# EAGLE board Qwiic_Power_Meter-ACS37800-Panel (EAGLE 9.6.2), part 1 of 2
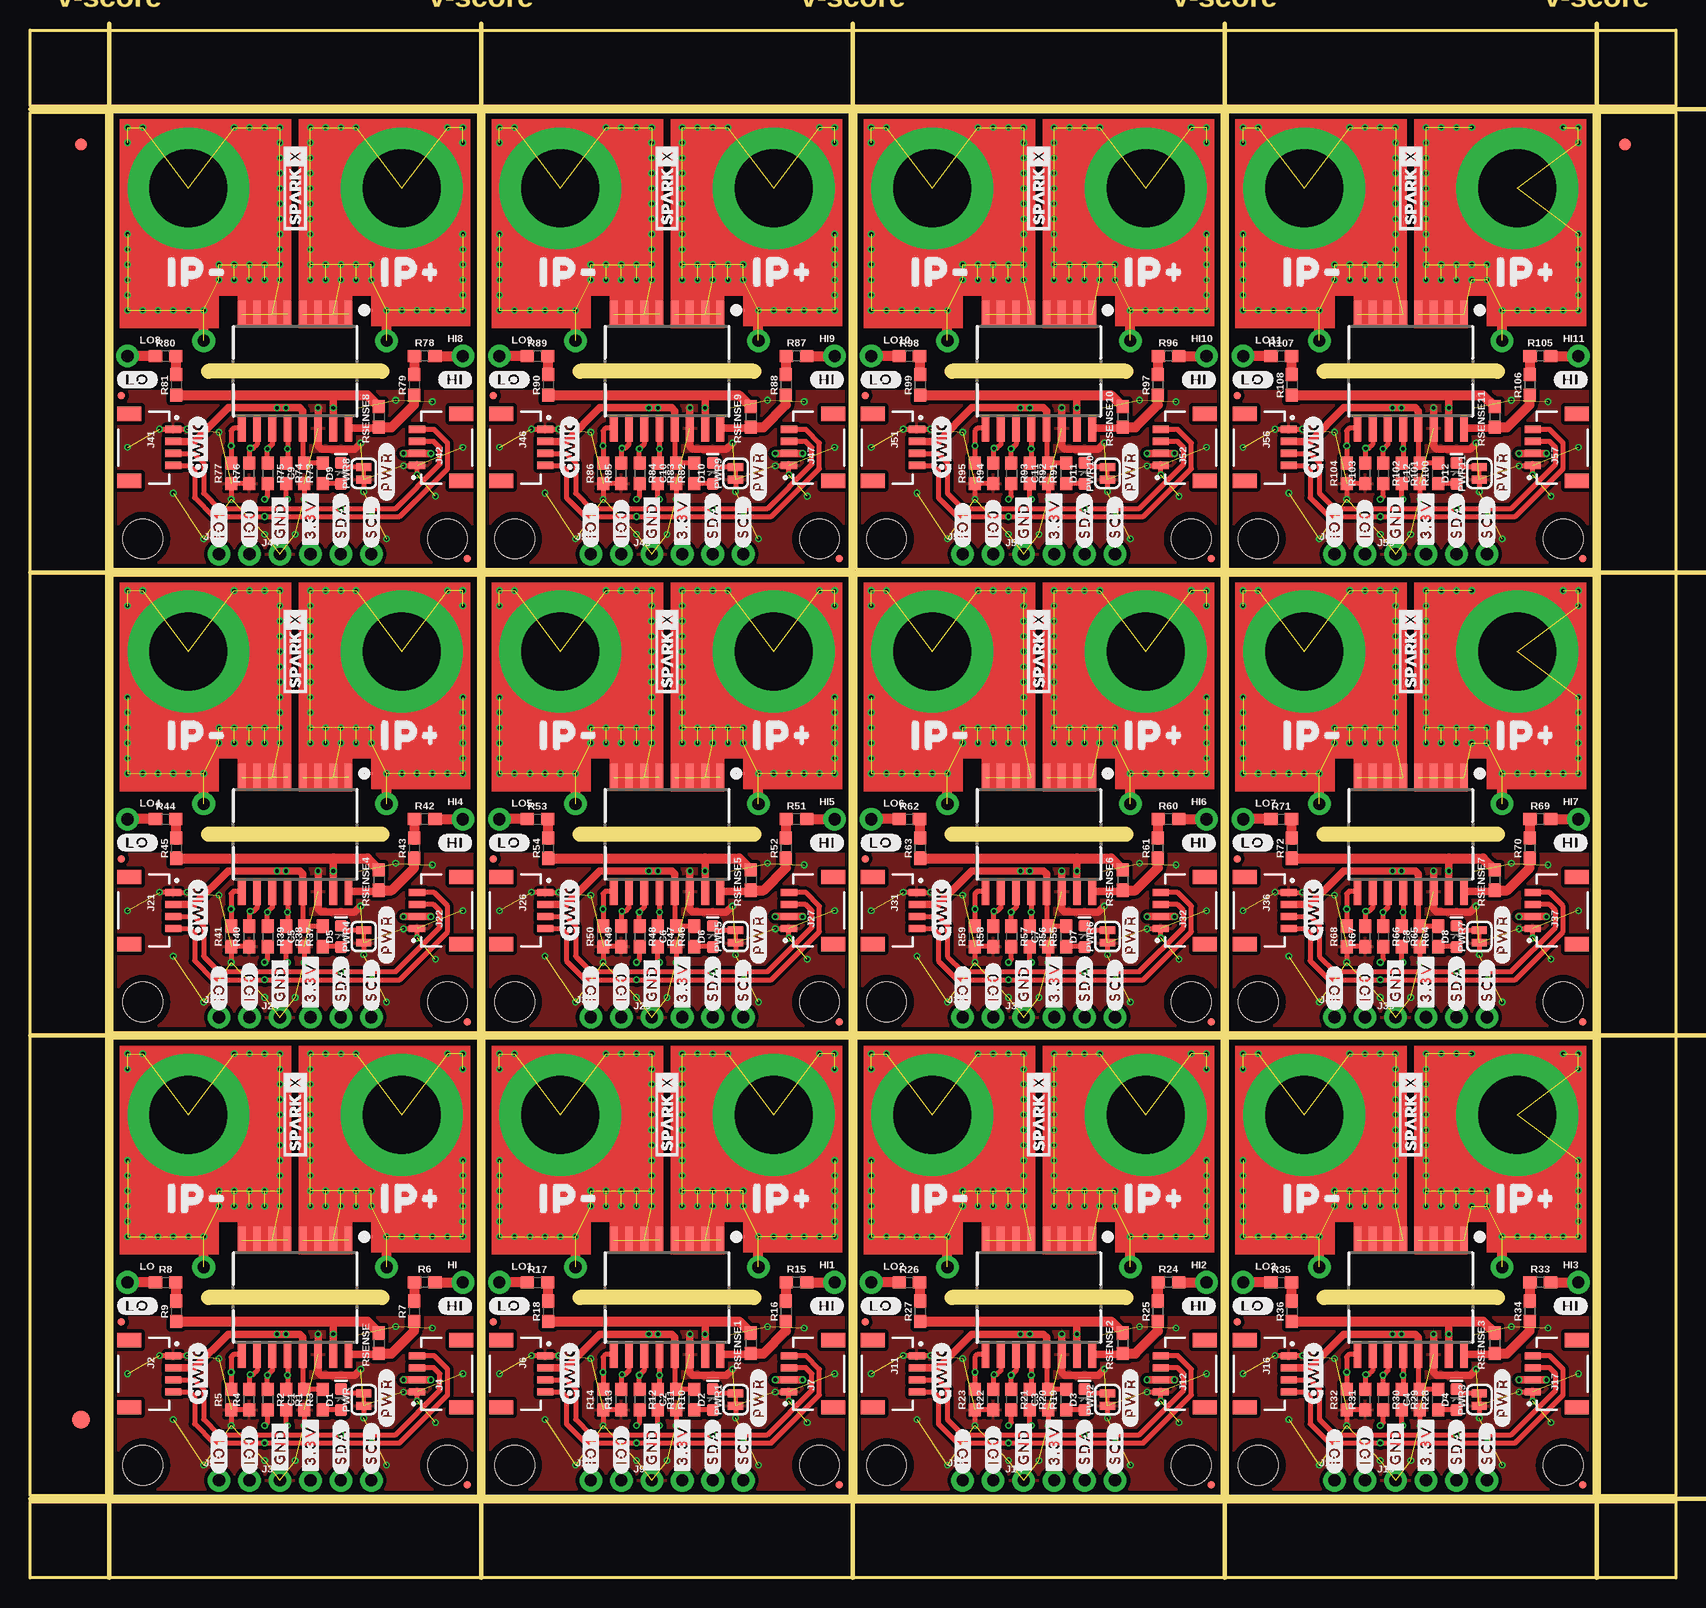
[diagram p0: board, top side]
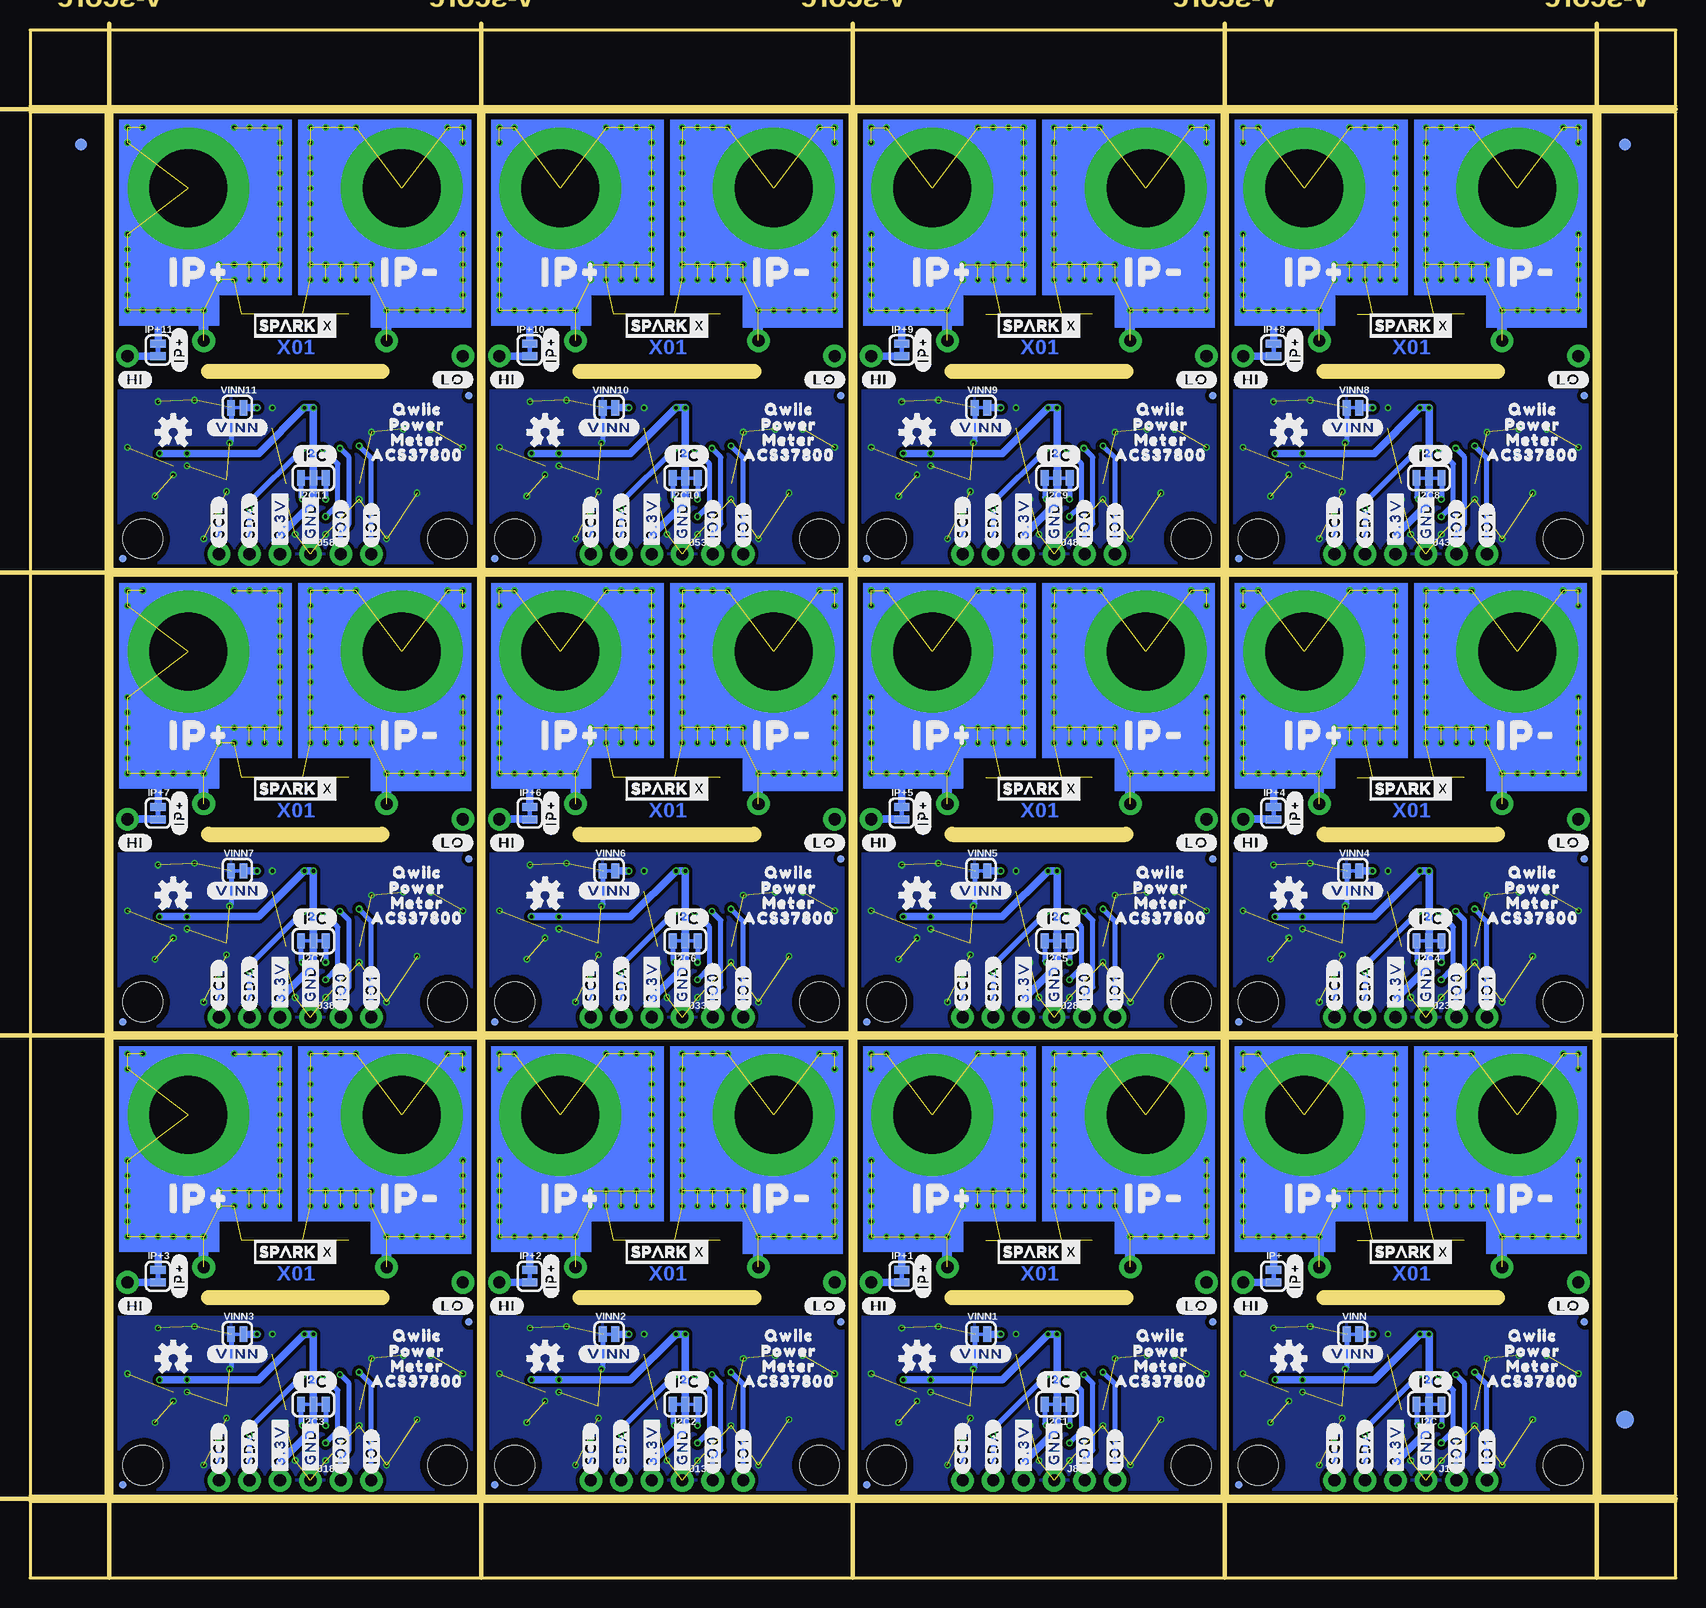
[diagram p1: board, bottom side, seen from below]

Size 137.16 x 129.03 mm. Coordinates in mm from the lower left corner, seen from the top.
Outline: 6.86,6.86 6.86,44.96 37.34,44.96 37.34,6.86 6.86,6.86
Outline: 37.85,6.86 37.85,44.96 68.33,44.96 68.33,6.86 37.85,6.86
Outline: 68.83,6.86 68.83,44.96 99.31,44.96 99.31,6.86 68.83,6.86
Outline: 99.82,6.86 99.82,44.96 130.3,44.96 130.3,6.86 99.82,6.86
Outline: 6.86,45.47 6.86,83.57 37.34,83.57 37.34,45.47 6.86,45.47
Outline: 37.85,45.47 37.85,83.57 68.33,83.57 68.33,45.47 37.85,45.47
Outline: 68.83,45.47 68.83,83.57 99.31,83.57 99.31,45.47 68.83,45.47
Outline: 99.82,45.47 99.82,83.57 130.3,83.57 130.3,45.47 99.82,45.47
Outline: 6.86,84.07 6.86,122.17 37.34,122.17 37.34,84.07 6.86,84.07
Outline: 37.85,84.07 37.85,122.17 68.33,122.17 68.33,84.07 37.85,84.07
Outline: 68.83,84.07 68.83,122.17 99.31,122.17 99.31,84.07 68.83,84.07
Outline: 99.82,84.07 99.82,122.17 130.3,122.17 130.3,84.07 99.82,84.07
Outline: 0,6.35 137.16,6.35 137.16,0 0,0 0,6.35
Outline: 130.81,122.17 137.16,122.17 137.16,6.86 130.81,6.86 130.81,122.17
Outline: 0,129.03 137.16,129.03 137.16,122.68 0,122.68 0,129.03
Outline: 0,122.17 6.35,122.17 6.35,6.86 0,6.86 0,122.17
Copper layers (1+2*15+16): Top 0.035mm / dielectric 0.2mm / Route2 0.0175mm / dielectric 1.065mm / Route15 0.0175mm / dielectric 0.2mm / Bottom 0.035mm
Design rules "Qwiic_Power_Meter-ACS37800": minimum track width 5mil, minimum drill 0.2mm, track to track 5mil, track to pad 0.2mm, pad to pad 5mil, via to via 0.2mm, smd to smd 0mil, copper to edge 0.2mm, drill to drill 10mil, minimum pad ring 0.13mm, minimum via ring 0.13mm, stop-mask expansion 0.05mm, vias tented up to drill 25mil, thermal gap 10mil
Milling: 9 lines

## Footprints (pad centres in the part's own frame; a part is rotated, then mirrored left to right if it is on the bottom)
0603 = smd 1.1 x 1: 1 -0.85,0; 2 0.85,0
LED-0603 = smd 1 x 1: A -0.877,0; C 0.877,0
FIDUCIAL-1X2 = smd 1 x 1: 1 0,0
FIDUCIAL-1.5X3 = smd 1.5 x 1.5: 1 0,0
1X01_NO_SILK = drill 1.016 pad 1.88: 1 0,0
SMT-JUMPER_3_2-NC_TRACE_SILK = smd 0.66 x 1.27: 1 -1.041,0; 2 0,0; 3 1.041,0
SMT-JUMPER_2_NC_TRACE_SILK = smd 0.66 x 1.27: 1 -0.521,0; 2 0.521,0
1X04_NO_SILK = drill 1.016 pad 1.88: 1 0,0; 2 2.54,0; 3 5.08,0; 4 7.62,0
JST04_1MM_RA = smd 0.6 x 1.35: 1 -1.5,0; 2 -0.5,0; 3 0.5,0; 4 1.5,0 | smd 1.2 x 2: NC1 2.8,-3.675; NC2 -2.8,-3.675
MICRO-FIDUCIAL = smd 0.635 x 0.635: 1 0,0
STAND-OFF = hole 3.302: 0,0
ACS37800_THROUGH_HOLE = smd 2.25 x 0.65: 1 -4.75,4.445; 2 -4.75,3.175; 3 -4.75,1.905; 4 -4.75,0.635; 5 -4.75,-0.635; 6 -4.75,-1.905; 7 -4.75,-3.175; 8 -4.75,-4.445; 9 4.75,-4.445; 10 4.75,-3.175; 11 4.75,-1.905; 12 4.75,-0.635; 13 4.75,0.635; 14 4.75,1.905; 15 4.75,3.175; 16 4.75,4.445 | drill 6.5 pad 10.16: C_IN -15.24,8.89; C_OUT -15.24,-8.89 | drill 1.016 pad 1.88: C_IN_BREAKOUT -2.54,7.62; C_OUT_BREAKOUT -2.54,-7.62 | drill 0.3: CIN1 -20.32,13.97; CIN2 -20.32,12.7; CIN3 -20.32,5.08; CIN4 -20.32,3.81; CIN5 -20.32,2.54; CIN6 -20.32,1.27; CIN7 -19.05,1.27; CIN8 -17.78,1.27; CIN9 -16.51,1.27; CIN10 -15.24,1.27; CIN11 -13.97,1.27; CIN12 -12.7,1.27; CIN13 -11.43,1.27; CIN14 -10.16,1.27; CIN15 -8.89,1.27; CIN16 -7.62,1.27; CIN17 -8.89,2.54; CIN18 -7.62,2.54; CIN19 -8.89,3.81; CIN20 -7.62,3.81; CIN21 -8.89,5.08; CIN22 -7.62,5.08; CIN23 -8.89,6.35; CIN24 -7.62,6.35; CIN25 -5.08,7.62; CIN26 -5.08,8.89; CIN27 -5.08,10.16; CIN28 -5.08,11.43; CIN29 -5.08,12.7; CIN30 -5.08,13.97; CIN31 -6.35,13.97; CIN32 -7.62,13.97; CIN33 -8.89,13.97; CIN34 -10.16,13.97; CIN35 -11.43,13.97; CIN36 -19.05,13.97; COUT1 -20.32,-13.97; COUT2 -19.05,-13.97; COUT3 -11.43,-13.97; COUT4 -10.16,-13.97; COUT5 -8.89,-13.97; COUT6 -7.62,-13.97; COUT7 -6.35,-13.97; COUT8 -5.08,-13.97; COUT9 -5.08,-12.7; COUT10 -5.08,-11.43; COUT11 -5.08,-10.16; COUT12 -5.08,-8.89; COUT13 -5.08,-7.62; COUT14 -7.62,-6.35; COUT15 -8.89,-6.35; COUT16 -7.62,-5.08; COUT17 -8.89,-5.08; COUT18 -7.62,-3.81; COUT19 -8.89,-3.81; COUT20 -7.62,-2.54; COUT21 -8.89,-2.54; COUT22 -7.62,-1.27; COUT23 -8.89,-1.27; COUT24 -10.16,-1.27; COUT25 -11.43,-1.27; COUT26 -12.7,-1.27; COUT27 -13.97,-1.27; COUT28 -15.24,-1.27; COUT29 -16.51,-1.27; COUT30 -17.78,-1.27; COUT31 -19.05,-1.27; COUT32 -20.32,-1.27; COUT33 -20.32,-2.54; COUT34 -20.32,-3.81; COUT35 -20.32,-5.08; COUT36 -20.32,-12.7

## Placement (x,y rotation side)
C1  0.1uF  [0603]  22.86,14.86 270 top
C2  0.1uF  [0603]  53.85,14.86 270 top
C3  0.1uF  [0603]  84.84,14.86 270 top
C4  0.1uF  [0603]  115.82,14.86 270 top
C5  0.1uF  [0603]  22.86,53.47 270 top
C6  0.1uF  [0603]  53.85,53.47 270 top
C7  0.1uF  [0603]  84.84,53.47 270 top
C8  0.1uF  [0603]  115.82,53.47 270 top
C9  0.1uF  [0603]  22.86,92.08 270 top
C10  0.1uF  [0603]  53.85,92.08 270 top
C11  0.1uF  [0603]  84.84,92.08 270 top
C12  0.1uF  [0603]  115.82,92.08 270 top
D1  RED  [LED-0603]  25.91,14.86 90 top
D2  RED  [LED-0603]  56.9,14.86 90 top
D3  RED  [LED-0603]  87.88,14.86 90 top
D4  RED  [LED-0603]  118.87,14.86 90 top
D5  RED  [LED-0603]  25.91,53.47 90 top
D6  RED  [LED-0603]  56.9,53.47 90 top
D7  RED  [LED-0603]  87.88,53.47 90 top
D8  RED  [LED-0603]  118.87,53.47 90 top
D9  RED  [LED-0603]  25.91,92.08 90 top
D10  RED  [LED-0603]  56.9,92.08 90 top
D11  RED  [LED-0603]  87.88,92.08 90 top
D12  RED  [LED-0603]  118.87,92.08 90 top
E$1  [FIDUCIAL-1X2]  4.23,119.51 0 top
E$2  [FIDUCIAL-1X2]  4.23,119.51 0 bottom
E$3  [FIDUCIAL-1X2]  132.93,119.51 0 top
E$4  [FIDUCIAL-1X2]  132.93,119.51 0 bottom
E$5  [FIDUCIAL-1.5X3]  4.23,13.21 0 top
E$6  [FIDUCIAL-1.5X3]  4.23,13.21 0 bottom
HI  [1X01_NO_SILK]  36.07,24.64 0 top
HI1  [1X01_NO_SILK]  67.06,24.64 0 top
HI2  [1X01_NO_SILK]  98.04,24.64 0 top
HI3  [1X01_NO_SILK]  129.03,24.64 0 top
HI4  [1X01_NO_SILK]  36.07,63.25 0 top
HI5  [1X01_NO_SILK]  67.06,63.25 0 top
HI6  [1X01_NO_SILK]  98.04,63.25 0 top
HI7  [1X01_NO_SILK]  129.03,63.25 0 top
HI8  [1X01_NO_SILK]  36.07,101.85 0 top
HI9  [1X01_NO_SILK]  67.06,101.85 0 top
HI10  [1X01_NO_SILK]  98.04,101.85 0 top
HI11  [1X01_NO_SILK]  129.03,101.85 0 top
I2C  JUMPER-SMT_3_2-NC_TRACE_SILK  [SMT-JUMPER_3_2-NC_TRACE_SILK]  20.57,14.48 180 bottom
I2C1  JUMPER-SMT_3_2-NC_TRACE_SILK  [SMT-JUMPER_3_2-NC_TRACE_SILK]  51.56,14.48 180 bottom
I2C2  JUMPER-SMT_3_2-NC_TRACE_SILK  [SMT-JUMPER_3_2-NC_TRACE_SILK]  82.55,14.48 180 bottom
I2C3  JUMPER-SMT_3_2-NC_TRACE_SILK  [SMT-JUMPER_3_2-NC_TRACE_SILK]  113.54,14.48 180 bottom
I2C4  JUMPER-SMT_3_2-NC_TRACE_SILK  [SMT-JUMPER_3_2-NC_TRACE_SILK]  20.57,53.09 180 bottom
I2C5  JUMPER-SMT_3_2-NC_TRACE_SILK  [SMT-JUMPER_3_2-NC_TRACE_SILK]  51.56,53.09 180 bottom
I2C6  JUMPER-SMT_3_2-NC_TRACE_SILK  [SMT-JUMPER_3_2-NC_TRACE_SILK]  82.55,53.09 180 bottom
I2C7  JUMPER-SMT_3_2-NC_TRACE_SILK  [SMT-JUMPER_3_2-NC_TRACE_SILK]  113.54,53.09 180 bottom
I2C8  JUMPER-SMT_3_2-NC_TRACE_SILK  [SMT-JUMPER_3_2-NC_TRACE_SILK]  20.57,91.69 180 bottom
I2C9  JUMPER-SMT_3_2-NC_TRACE_SILK  [SMT-JUMPER_3_2-NC_TRACE_SILK]  51.56,91.69 180 bottom
I2C10  JUMPER-SMT_3_2-NC_TRACE_SILK  [SMT-JUMPER_3_2-NC_TRACE_SILK]  82.55,91.69 180 bottom
I2C11  JUMPER-SMT_3_2-NC_TRACE_SILK  [SMT-JUMPER_3_2-NC_TRACE_SILK]  113.54,91.69 180 bottom
IP+  JUMPER-SMT_2_NC_TRACE_SILK  [SMT-JUMPER_2_NC_TRACE_SILK]  33.53,25.15 270 bottom
IP+1  JUMPER-SMT_2_NC_TRACE_SILK  [SMT-JUMPER_2_NC_TRACE_SILK]  64.52,25.15 270 bottom
IP+2  JUMPER-SMT_2_NC_TRACE_SILK  [SMT-JUMPER_2_NC_TRACE_SILK]  95.5,25.15 270 bottom
IP+3  JUMPER-SMT_2_NC_TRACE_SILK  [SMT-JUMPER_2_NC_TRACE_SILK]  126.49,25.15 270 bottom
IP+4  JUMPER-SMT_2_NC_TRACE_SILK  [SMT-JUMPER_2_NC_TRACE_SILK]  33.53,63.75 270 bottom
IP+5  JUMPER-SMT_2_NC_TRACE_SILK  [SMT-JUMPER_2_NC_TRACE_SILK]  64.52,63.75 270 bottom
IP+6  JUMPER-SMT_2_NC_TRACE_SILK  [SMT-JUMPER_2_NC_TRACE_SILK]  95.5,63.75 270 bottom
IP+7  JUMPER-SMT_2_NC_TRACE_SILK  [SMT-JUMPER_2_NC_TRACE_SILK]  126.49,63.75 270 bottom
IP+8  JUMPER-SMT_2_NC_TRACE_SILK  [SMT-JUMPER_2_NC_TRACE_SILK]  33.53,102.36 270 bottom
IP+9  JUMPER-SMT_2_NC_TRACE_SILK  [SMT-JUMPER_2_NC_TRACE_SILK]  64.52,102.36 270 bottom
IP+10  JUMPER-SMT_2_NC_TRACE_SILK  [SMT-JUMPER_2_NC_TRACE_SILK]  95.5,102.36 270 bottom
IP+11  JUMPER-SMT_2_NC_TRACE_SILK  [SMT-JUMPER_2_NC_TRACE_SILK]  126.49,102.36 270 bottom
J1  [1X04_NO_SILK]  20.83,8.13 180 bottom
J2  QWIIC_RIGHT_ANGLE  [JST04_1MM_RA]  11.94,17.02 270 top
J3  [1X01_NO_SILK]  18.29,8.13 0 top
J4  QWIIC_RIGHT_ANGLE  [JST04_1MM_RA]  32.26,17.02 90 top
J5  [1X01_NO_SILK]  15.75,8.13 0 top
J6  QWIIC_RIGHT_ANGLE  [JST04_1MM_RA]  42.93,17.02 270 top
J7  QWIIC_RIGHT_ANGLE  [JST04_1MM_RA]  63.25,17.02 90 top
J8  [1X04_NO_SILK]  51.82,8.13 180 bottom
J9  [1X01_NO_SILK]  49.28,8.13 0 top
J10  [1X01_NO_SILK]  46.74,8.13 0 top
J11  QWIIC_RIGHT_ANGLE  [JST04_1MM_RA]  73.91,17.02 270 top
J12  QWIIC_RIGHT_ANGLE  [JST04_1MM_RA]  94.23,17.02 90 top
J13  [1X04_NO_SILK]  82.8,8.13 180 bottom
J14  [1X01_NO_SILK]  80.26,8.13 0 top
J15  [1X01_NO_SILK]  77.72,8.13 0 top
J16  QWIIC_RIGHT_ANGLE  [JST04_1MM_RA]  104.9,17.02 270 top
J17  QWIIC_RIGHT_ANGLE  [JST04_1MM_RA]  125.22,17.02 90 top
J18  [1X04_NO_SILK]  113.79,8.13 180 bottom
J19  [1X01_NO_SILK]  111.25,8.13 0 top
J20  [1X01_NO_SILK]  108.71,8.13 0 top
J21  QWIIC_RIGHT_ANGLE  [JST04_1MM_RA]  11.94,55.63 270 top
J22  QWIIC_RIGHT_ANGLE  [JST04_1MM_RA]  32.26,55.63 90 top
J23  [1X04_NO_SILK]  20.83,46.74 180 bottom
J24  [1X01_NO_SILK]  18.29,46.74 0 top
J25  [1X01_NO_SILK]  15.75,46.74 0 top
J26  QWIIC_RIGHT_ANGLE  [JST04_1MM_RA]  42.93,55.63 270 top
J27  QWIIC_RIGHT_ANGLE  [JST04_1MM_RA]  63.25,55.63 90 top
J28  [1X04_NO_SILK]  51.82,46.74 180 bottom
J29  [1X01_NO_SILK]  49.28,46.74 0 top
J30  [1X01_NO_SILK]  46.74,46.74 0 top
J31  QWIIC_RIGHT_ANGLE  [JST04_1MM_RA]  73.91,55.63 270 top
J32  QWIIC_RIGHT_ANGLE  [JST04_1MM_RA]  94.23,55.63 90 top
J33  [1X04_NO_SILK]  82.8,46.74 180 bottom
J34  [1X01_NO_SILK]  80.26,46.74 0 top
J35  [1X01_NO_SILK]  77.72,46.74 0 top
J36  QWIIC_RIGHT_ANGLE  [JST04_1MM_RA]  104.9,55.63 270 top
J37  QWIIC_RIGHT_ANGLE  [JST04_1MM_RA]  125.22,55.63 90 top
J38  [1X04_NO_SILK]  113.79,46.74 180 bottom
J39  [1X01_NO_SILK]  111.25,46.74 0 top
J40  [1X01_NO_SILK]  108.71,46.74 0 top
J41  QWIIC_RIGHT_ANGLE  [JST04_1MM_RA]  11.94,94.23 270 top
J42  QWIIC_RIGHT_ANGLE  [JST04_1MM_RA]  32.26,94.23 90 top
J43  [1X04_NO_SILK]  20.83,85.34 180 bottom
J44  [1X01_NO_SILK]  18.29,85.34 0 top
J45  [1X01_NO_SILK]  15.75,85.34 0 top
J46  QWIIC_RIGHT_ANGLE  [JST04_1MM_RA]  42.93,94.23 270 top
J47  QWIIC_RIGHT_ANGLE  [JST04_1MM_RA]  63.25,94.23 90 top
J48  [1X04_NO_SILK]  51.82,85.34 180 bottom
J49  [1X01_NO_SILK]  49.28,85.34 0 top
J50  [1X01_NO_SILK]  46.74,85.34 0 top
J51  QWIIC_RIGHT_ANGLE  [JST04_1MM_RA]  73.91,94.23 270 top
J52  QWIIC_RIGHT_ANGLE  [JST04_1MM_RA]  94.23,94.23 90 top
J53  [1X04_NO_SILK]  82.8,85.34 180 bottom
J54  [1X01_NO_SILK]  80.26,85.34 0 top
J55  [1X01_NO_SILK]  77.72,85.34 0 top
J56  QWIIC_RIGHT_ANGLE  [JST04_1MM_RA]  104.9,94.23 270 top
J57  QWIIC_RIGHT_ANGLE  [JST04_1MM_RA]  125.22,94.23 90 top
J58  [1X04_NO_SILK]  113.79,85.34 180 bottom
J59  [1X01_NO_SILK]  111.25,85.34 0 top
J60  [1X01_NO_SILK]  108.71,85.34 0 top
JP1  FIDUCIALUFIDUCIAL  [MICRO-FIDUCIAL]  7.62,21.34 0 bottom
JP2  FIDUCIALUFIDUCIAL  [MICRO-FIDUCIAL]  36.45,7.75 0 top
JP3  STAND-OFF  [STAND-OFF]  9.4,9.4 0 top
JP4  STAND-OFF  [STAND-OFF]  34.8,9.4 0 top
JP5  FIDUCIALUFIDUCIAL  [MICRO-FIDUCIAL]  36.45,7.75 0 bottom
JP6  FIDUCIALUFIDUCIAL  [MICRO-FIDUCIAL]  7.62,21.34 0 top
JP7  STAND-OFF  [STAND-OFF]  40.39,9.4 0 top
JP8  STAND-OFF  [STAND-OFF]  65.79,9.4 0 top
JP9  FIDUCIALUFIDUCIAL  [MICRO-FIDUCIAL]  67.44,7.75 0 top
JP10  FIDUCIALUFIDUCIAL  [MICRO-FIDUCIAL]  38.61,21.34 0 top
JP11  FIDUCIALUFIDUCIAL  [MICRO-FIDUCIAL]  38.61,21.34 0 bottom
JP12  FIDUCIALUFIDUCIAL  [MICRO-FIDUCIAL]  67.44,7.75 0 bottom
JP13  STAND-OFF  [STAND-OFF]  71.37,9.4 0 top
JP14  STAND-OFF  [STAND-OFF]  96.77,9.4 0 top
JP15  FIDUCIALUFIDUCIAL  [MICRO-FIDUCIAL]  98.42,7.75 0 top
JP16  FIDUCIALUFIDUCIAL  [MICRO-FIDUCIAL]  69.6,21.34 0 top
JP17  FIDUCIALUFIDUCIAL  [MICRO-FIDUCIAL]  69.6,21.34 0 bottom
JP18  FIDUCIALUFIDUCIAL  [MICRO-FIDUCIAL]  98.42,7.75 0 bottom
JP19  STAND-OFF  [STAND-OFF]  102.36,9.4 0 top
JP20  STAND-OFF  [STAND-OFF]  127.76,9.4 0 top
JP21  FIDUCIALUFIDUCIAL  [MICRO-FIDUCIAL]  129.41,7.75 0 top
JP22  FIDUCIALUFIDUCIAL  [MICRO-FIDUCIAL]  100.58,21.34 0 top
JP23  FIDUCIALUFIDUCIAL  [MICRO-FIDUCIAL]  100.58,21.34 0 bottom
JP24  FIDUCIALUFIDUCIAL  [MICRO-FIDUCIAL]  129.41,7.75 0 bottom
JP25  STAND-OFF  [STAND-OFF]  9.4,48.01 0 top
JP26  STAND-OFF  [STAND-OFF]  34.8,48.01 0 top
JP27  FIDUCIALUFIDUCIAL  [MICRO-FIDUCIAL]  36.45,46.35 0 top
JP28  FIDUCIALUFIDUCIAL  [MICRO-FIDUCIAL]  7.62,59.94 0 top
JP29  FIDUCIALUFIDUCIAL  [MICRO-FIDUCIAL]  7.62,59.94 0 bottom
JP30  FIDUCIALUFIDUCIAL  [MICRO-FIDUCIAL]  36.45,46.35 0 bottom
JP31  STAND-OFF  [STAND-OFF]  40.39,48.01 0 top
JP32  STAND-OFF  [STAND-OFF]  65.79,48.01 0 top
JP33  FIDUCIALUFIDUCIAL  [MICRO-FIDUCIAL]  67.44,46.35 0 top
JP34  FIDUCIALUFIDUCIAL  [MICRO-FIDUCIAL]  38.61,59.94 0 top
JP35  FIDUCIALUFIDUCIAL  [MICRO-FIDUCIAL]  38.61,59.94 0 bottom
JP36  FIDUCIALUFIDUCIAL  [MICRO-FIDUCIAL]  67.44,46.35 0 bottom
JP37  STAND-OFF  [STAND-OFF]  71.37,48.01 0 top
JP38  STAND-OFF  [STAND-OFF]  96.77,48.01 0 top
JP39  FIDUCIALUFIDUCIAL  [MICRO-FIDUCIAL]  98.42,46.35 0 top
JP40  FIDUCIALUFIDUCIAL  [MICRO-FIDUCIAL]  69.6,59.94 0 top
JP41  FIDUCIALUFIDUCIAL  [MICRO-FIDUCIAL]  69.6,59.94 0 bottom
JP42  FIDUCIALUFIDUCIAL  [MICRO-FIDUCIAL]  98.42,46.35 0 bottom
JP43  STAND-OFF  [STAND-OFF]  102.36,48.01 0 top
JP44  STAND-OFF  [STAND-OFF]  127.76,48.01 0 top
JP45  FIDUCIALUFIDUCIAL  [MICRO-FIDUCIAL]  129.41,46.35 0 top
JP46  FIDUCIALUFIDUCIAL  [MICRO-FIDUCIAL]  100.58,59.94 0 top
JP47  FIDUCIALUFIDUCIAL  [MICRO-FIDUCIAL]  100.58,59.94 0 bottom
JP48  FIDUCIALUFIDUCIAL  [MICRO-FIDUCIAL]  129.41,46.35 0 bottom
JP49  STAND-OFF  [STAND-OFF]  9.4,86.61 0 top
JP50  STAND-OFF  [STAND-OFF]  34.8,86.61 0 top
JP51  FIDUCIALUFIDUCIAL  [MICRO-FIDUCIAL]  36.45,84.96 0 top
JP52  FIDUCIALUFIDUCIAL  [MICRO-FIDUCIAL]  7.62,98.55 0 top
JP53  FIDUCIALUFIDUCIAL  [MICRO-FIDUCIAL]  7.62,98.55 0 bottom
JP54  FIDUCIALUFIDUCIAL  [MICRO-FIDUCIAL]  36.45,84.96 0 bottom
JP55  STAND-OFF  [STAND-OFF]  40.39,86.61 0 top
JP56  STAND-OFF  [STAND-OFF]  65.79,86.61 0 top
JP57  FIDUCIALUFIDUCIAL  [MICRO-FIDUCIAL]  67.44,84.96 0 top
JP58  FIDUCIALUFIDUCIAL  [MICRO-FIDUCIAL]  38.61,98.55 0 top
JP59  FIDUCIALUFIDUCIAL  [MICRO-FIDUCIAL]  38.61,98.55 0 bottom
JP60  FIDUCIALUFIDUCIAL  [MICRO-FIDUCIAL]  67.44,84.96 0 bottom
JP61  STAND-OFF  [STAND-OFF]  71.37,86.61 0 top
JP62  STAND-OFF  [STAND-OFF]  96.77,86.61 0 top
JP63  FIDUCIALUFIDUCIAL  [MICRO-FIDUCIAL]  98.42,84.96 0 top
JP64  FIDUCIALUFIDUCIAL  [MICRO-FIDUCIAL]  69.6,98.55 0 top
JP65  FIDUCIALUFIDUCIAL  [MICRO-FIDUCIAL]  69.6,98.55 0 bottom
JP66  FIDUCIALUFIDUCIAL  [MICRO-FIDUCIAL]  98.42,84.96 0 bottom
JP67  STAND-OFF  [STAND-OFF]  102.36,86.61 0 top
JP68  STAND-OFF  [STAND-OFF]  127.76,86.61 0 top
JP69  FIDUCIALUFIDUCIAL  [MICRO-FIDUCIAL]  129.41,84.96 0 top
JP70  FIDUCIALUFIDUCIAL  [MICRO-FIDUCIAL]  100.58,98.55 0 top
JP71  FIDUCIALUFIDUCIAL  [MICRO-FIDUCIAL]  100.58,98.55 0 bottom
JP72  FIDUCIALUFIDUCIAL  [MICRO-FIDUCIAL]  129.41,84.96 0 bottom
LO  [1X01_NO_SILK]  8.13,24.64 0 top
LO1  [1X01_NO_SILK]  39.12,24.64 0 top
LO2  [1X01_NO_SILK]  70.1,24.64 0 top
LO3  [1X01_NO_SILK]  101.09,24.64 0 top
LO4  [1X01_NO_SILK]  8.13,63.25 0 top
LO5  [1X01_NO_SILK]  39.12,63.25 0 top
LO6  [1X01_NO_SILK]  70.1,63.25 0 top
LO7  [1X01_NO_SILK]  101.09,63.25 0 top
LO8  [1X01_NO_SILK]  8.13,101.85 0 top
LO9  [1X01_NO_SILK]  39.12,101.85 0 top
LO10  [1X01_NO_SILK]  70.1,101.85 0 top
LO11  [1X01_NO_SILK]  101.09,101.85 0 top
LOGO1  OSHW-LOGOS  [OSHW-LOGO-S]  63.25,18.29 0 bottom
LOGO2  OSHW-LOGOS  [OSHW-LOGO-S]  94.23,18.29 0 bottom
LOGO3  OSHW-LOGOS  [OSHW-LOGO-S]  125.22,18.29 0 bottom
LOGO4  OSHW-LOGOS  [OSHW-LOGO-S]  32.26,56.9 0 bottom
LOGO5  OSHW-LOGOS  [OSHW-LOGO-S]  32.26,18.29 0 bottom
LOGO6  OSHW-LOGOS  [OSHW-LOGO-S]  63.25,56.9 0 bottom
LOGO7  OSHW-LOGOS  [OSHW-LOGO-S]  94.23,56.9 0 bottom
LOGO8  OSHW-LOGOS  [OSHW-LOGO-S]  125.22,56.9 0 bottom
LOGO9  OSHW-LOGOS  [OSHW-LOGO-S]  32.26,95.5 0 bottom
LOGO10  OSHW-LOGOS  [OSHW-LOGO-S]  63.25,95.5 0 bottom
LOGO11  OSHW-LOGOS  [OSHW-LOGO-S]  94.23,95.5 0 bottom
LOGO12  OSHW-LOGOS  [OSHW-LOGO-S]  125.22,95.5 0 bottom
PWR  JUMPER-SMT_2_NC_TRACE_SILK  [SMT-JUMPER_2_NC_TRACE_SILK]  27.81,14.86 90 top
PWR1  JUMPER-SMT_2_NC_TRACE_SILK  [SMT-JUMPER_2_NC_TRACE_SILK]  58.8,14.86 90 top
PWR2  JUMPER-SMT_2_NC_TRACE_SILK  [SMT-JUMPER_2_NC_TRACE_SILK]  89.79,14.86 90 top
PWR3  JUMPER-SMT_2_NC_TRACE_SILK  [SMT-JUMPER_2_NC_TRACE_SILK]  120.78,14.86 90 top
PWR4  JUMPER-SMT_2_NC_TRACE_SILK  [SMT-JUMPER_2_NC_TRACE_SILK]  27.81,53.47 90 top
PWR5  JUMPER-SMT_2_NC_TRACE_SILK  [SMT-JUMPER_2_NC_TRACE_SILK]  58.8,53.47 90 top
PWR6  JUMPER-SMT_2_NC_TRACE_SILK  [SMT-JUMPER_2_NC_TRACE_SILK]  89.79,53.47 90 top
PWR7  JUMPER-SMT_2_NC_TRACE_SILK  [SMT-JUMPER_2_NC_TRACE_SILK]  120.78,53.47 90 top
PWR8  JUMPER-SMT_2_NC_TRACE_SILK  [SMT-JUMPER_2_NC_TRACE_SILK]  27.81,92.08 90 top
PWR9  JUMPER-SMT_2_NC_TRACE_SILK  [SMT-JUMPER_2_NC_TRACE_SILK]  58.8,92.08 90 top
PWR10  JUMPER-SMT_2_NC_TRACE_SILK  [SMT-JUMPER_2_NC_TRACE_SILK]  89.79,92.08 90 top
PWR11  JUMPER-SMT_2_NC_TRACE_SILK  [SMT-JUMPER_2_NC_TRACE_SILK]  120.78,92.08 90 top
R1  4.7k  [0603]  21.34,14.86 270 top
R2  4.7k  [0603]  19.81,14.86 270 top
R3  1k  [0603]  24.38,14.86 90 top
R4  4.7k  [0603]  18.29,14.86 90 top
R5  4.7k  [0603]  16.76,14.86 90 top
R6  1M  [0603]  32.89,24.64 180 top
R7  1M  [0603]  32,22.23 270 top
R8  1M  [0603]  11.3,24.64 0 top
R9  1M  [0603]  12.19,22.23 270 top
R10  1k  [0603]  55.37,14.86 90 top
R11  4.7k  [0603]  52.32,14.86 270 top
R12  4.7k  [0603]  50.8,14.86 270 top
R13  4.7k  [0603]  49.28,14.86 90 top
R14  4.7k  [0603]  47.75,14.86 90 top
R15  1M  [0603]  63.88,24.64 180 top
R16  1M  [0603]  62.99,22.23 270 top
R17  1M  [0603]  42.29,24.64 0 top
R18  1M  [0603]  43.18,22.23 270 top
R19  1k  [0603]  86.36,14.86 90 top
R20  4.7k  [0603]  83.31,14.86 270 top
R21  4.7k  [0603]  81.79,14.86 270 top
R22  4.7k  [0603]  80.26,14.86 90 top
R23  4.7k  [0603]  78.74,14.86 90 top
R24  1M  [0603]  94.87,24.64 180 top
R25  1M  [0603]  93.98,22.23 270 top
R26  1M  [0603]  73.28,24.64 0 top
R27  1M  [0603]  74.17,22.23 270 top
R28  1k  [0603]  117.35,14.86 90 top
R29  4.7k  [0603]  114.3,14.86 270 top
R30  4.7k  [0603]  112.78,14.86 270 top
R31  4.7k  [0603]  111.25,14.86 90 top
R32  4.7k  [0603]  109.73,14.86 90 top
R33  1M  [0603]  125.86,24.64 180 top
R34  1M  [0603]  124.97,22.23 270 top
R35  1M  [0603]  104.27,24.64 0 top
R36  1M  [0603]  105.16,22.23 270 top
R37  1k  [0603]  24.38,53.47 90 top
R38  4.7k  [0603]  21.34,53.47 270 top
R39  4.7k  [0603]  19.81,53.47 270 top
R40  4.7k  [0603]  18.29,53.47 90 top
R41  4.7k  [0603]  16.76,53.47 90 top
R42  1M  [0603]  32.89,63.25 180 top
R43  1M  [0603]  32,60.83 270 top
R44  1M  [0603]  11.3,63.25 0 top
R45  1M  [0603]  12.19,60.83 270 top
R46  1k  [0603]  55.37,53.47 90 top
R47  4.7k  [0603]  52.32,53.47 270 top
R48  4.7k  [0603]  50.8,53.47 270 top
R49  4.7k  [0603]  49.28,53.47 90 top
R50  4.7k  [0603]  47.75,53.47 90 top
R51  1M  [0603]  63.88,63.25 180 top
R52  1M  [0603]  62.99,60.83 270 top
R53  1M  [0603]  42.29,63.25 0 top
R54  1M  [0603]  43.18,60.83 270 top
R55  1k  [0603]  86.36,53.47 90 top
R56  4.7k  [0603]  83.31,53.47 270 top
R57  4.7k  [0603]  81.79,53.47 270 top
R58  4.7k  [0603]  80.26,53.47 90 top
R59  4.7k  [0603]  78.74,53.47 90 top
R60  1M  [0603]  94.87,63.25 180 top
R61  1M  [0603]  93.98,60.83 270 top
R62  1M  [0603]  73.28,63.25 0 top
R63  1M  [0603]  74.17,60.83 270 top
R64  1k  [0603]  117.35,53.47 90 top
R65  4.7k  [0603]  114.3,53.47 270 top
R66  4.7k  [0603]  112.78,53.47 270 top
R67  4.7k  [0603]  111.25,53.47 90 top
R68  4.7k  [0603]  109.73,53.47 90 top
R69  1M  [0603]  125.86,63.25 180 top
R70  1M  [0603]  124.97,60.83 270 top
R71  1M  [0603]  104.27,63.25 0 top
R72  1M  [0603]  105.16,60.83 270 top
R73  1k  [0603]  24.38,92.08 90 top
R74  4.7k  [0603]  21.34,92.08 270 top
R75  4.7k  [0603]  19.81,92.08 270 top
R76  4.7k  [0603]  18.29,92.08 90 top
R77  4.7k  [0603]  16.76,92.08 90 top
R78  1M  [0603]  32.89,101.85 180 top
R79  1M  [0603]  32,99.44 270 top
R80  1M  [0603]  11.3,101.85 0 top
R81  1M  [0603]  12.19,99.44 270 top
R82  1k  [0603]  55.37,92.08 90 top
R83  4.7k  [0603]  52.32,92.08 270 top
R84  4.7k  [0603]  50.8,92.08 270 top
R85  4.7k  [0603]  49.28,92.08 90 top
R86  4.7k  [0603]  47.75,92.08 90 top
R87  1M  [0603]  63.88,101.85 180 top
R88  1M  [0603]  62.99,99.44 270 top
R89  1M  [0603]  42.29,101.85 0 top
R90  1M  [0603]  43.18,99.44 270 top
R91  1k  [0603]  86.36,92.08 90 top
R92  4.7k  [0603]  83.31,92.08 270 top
R93  4.7k  [0603]  81.79,92.08 270 top
R94  4.7k  [0603]  80.26,92.08 90 top
R95  4.7k  [0603]  78.74,92.08 90 top
R96  1M  [0603]  94.87,101.85 180 top
R97  1M  [0603]  93.98,99.44 270 top
R98  1M  [0603]  73.28,101.85 0 top
R99  1M  [0603]  74.17,99.44 270 top
R100  1k  [0603]  117.35,92.08 90 top
R101  4.7k  [0603]  114.3,92.08 270 top
R102  4.7k  [0603]  112.78,92.08 270 top
R103  4.7k  [0603]  111.25,92.08 90 top
R104  4.7k  [0603]  109.73,92.08 90 top
R105  1M  [0603]  125.86,101.85 180 top
R106  1M  [0603]  124.97,99.44 270 top
R107  1M  [0603]  104.27,101.85 0 top
R108  1M  [0603]  105.16,99.44 270 top
RSENSE  8.2k  [0603]  29.08,19.56 270 top
RSENSE1  8.2k  [0603]  60.07,19.56 270 top
RSENSE2  8.2k  [0603]  91.06,19.56 270 top
RSENSE3  8.2k  [0603]  122.05,19.56 270 top
RSENSE4  8.2k  [0603]  29.08,58.17 270 top
RSENSE5  8.2k  [0603]  60.07,58.17 270 top
RSENSE6  8.2k  [0603]  91.06,58.17 270 top
RSENSE7  8.2k  [0603]  122.05,58.17 270 top
RSENSE8  8.2k  [0603]  29.08,96.77 270 top
RSENSE9  8.2k  [0603]  60.07,96.77 270 top
RSENSE10  8.2k  [0603]  91.06,96.77 270 top
RSENSE11  8.2k  [0603]  122.05,96.77 270 top
U1  [ACS37800_THROUGH_HOLE]  22.1,23.37 270 top
U2  [ACS37800_THROUGH_HOLE]  53.09,23.37 270 top
U3  [ACS37800_THROUGH_HOLE]  84.07,23.37 270 top
U4  [ACS37800_THROUGH_HOLE]  115.06,23.37 270 top
U5  [ACS37800_THROUGH_HOLE]  22.1,61.98 270 top
U6  [ACS37800_THROUGH_HOLE]  53.09,61.98 270 top
U7  [ACS37800_THROUGH_HOLE]  84.07,61.98 270 top
U8  [ACS37800_THROUGH_HOLE]  115.06,61.98 270 top
U9  [ACS37800_THROUGH_HOLE]  22.1,100.58 270 top
U10  [ACS37800_THROUGH_HOLE]  53.09,100.58 270 top
U11  [ACS37800_THROUGH_HOLE]  84.07,100.58 270 top
U12  [ACS37800_THROUGH_HOLE]  115.06,100.58 270 top
U$1  [#GND#0]  20.83,10.92 90 bottom
U$2  [#3#3V#0]  23.37,11.05 90 bottom
U$3  [#SDA#0]  25.91,10.92 90 bottom
U$4  [#SCL#0]  28.45,10.79 90 bottom
U$5  [#IO0#0]  18.29,10.67 90 top
U$6  [#IO0#0]  18.29,10.67 90 bottom
U$7  [#IO1#0]  15.75,10.54 90 top
U$8  [#IO1#0]  15.75,10.54 90 bottom
U$9  [IP#0]  31.75,31.62 0 top
U$10  [IP#0]  30.1,31.62 0 bottom
U$11  [IP#0]  13.97,31.62 0 top
U$12  [IP#0]  12.45,31.62 0 bottom
U$13  [#HI#0]  35.43,22.67 0 top
U$14  [#HI#0]  35.43,22.67 0 bottom
U$15  [I2C]  22.35,16.38 0 bottom
U$16  [QWIIC_5MM]  13.97,17.02 90 top
U$17  [#LO#0]  8.95,22.67 0 top
U$18  SPARKX-LOGO3  [SPARKX-SMALL]  22.1,27.18 0 bottom
U$19  [#LO#0]  8.95,22.67 0 bottom
U$20  SPARKX-LOGO3  [SPARKX-SMALL]  22.1,38.61 90 top
U$21  [#VINN#0]  26.92,18.67 0 bottom
U$22  [#IP##0]  31.75,25.15 90 bottom
U$23  [ACS378000]  11.94,16.38 0 bottom
U$24  [METER0]  11.94,17.65 0 bottom
U$25  [POWER0]  11.94,18.92 0 bottom
U$26  [QWIIC0]  11.94,20.19 0 bottom
U$27  [I2C]  53.34,16.38 0 bottom
U$28  [QWIIC_5MM]  44.96,17.02 90 top
U$29  SPARKX-LOGO3  [SPARKX-SMALL]  53.09,27.18 0 bottom
U$30  [#PWR#0]  60.71,14.99 90 top
U$31  [#GND#0]  51.82,10.92 90 top
U$32  [#PWR#0]  29.72,14.99 90 top
U$33  [#GND#0]  20.83,10.92 90 top
U$34  [#3#3V#0]  23.37,11.05 90 top
U$35  [#SDA#0]  25.91,10.92 90 top
U$36  [#SCL#0]  28.45,10.79 90 top
U$37  [#3#3V#0]  54.36,11.05 90 top
U$38  [#SDA#0]  56.9,10.92 90 top
U$39  [#SCL#0]  59.44,10.79 90 top
U$40  [#GND#0]  51.82,10.92 90 bottom
U$41  [#3#3V#0]  54.36,11.05 90 bottom
U$42  [#SDA#0]  56.9,10.92 90 bottom
U$43  [#SCL#0]  59.44,10.79 90 bottom
U$44  SPARKX-LOGO3  [SPARKX-SMALL]  53.09,38.61 90 top
U$45  [IP#0]  62.74,31.62 0 top
U$46  [IP#0]  61.09,31.62 0 bottom
U$47  [IP#0]  44.96,31.62 0 top
U$48  [IP#0]  43.43,31.62 0 bottom
U$49  [#HI#0]  66.42,22.67 0 top
U$50  [#HI#0]  66.42,22.67 0 bottom
U$51  [#LO#0]  39.94,22.67 0 top
U$52  [#LO#0]  39.94,22.67 0 bottom
U$53  [#VINN#0]  57.91,18.67 0 bottom
U$54  [#IP##0]  62.74,25.15 90 bottom
U$55  [ACS378000]  42.93,16.38 0 bottom
U$56  [METER0]  42.93,17.65 0 bottom
U$57  [POWER0]  42.93,18.92 0 bottom
U$58  [QWIIC0]  42.93,20.19 0 bottom
U$59  [#IO0#0]  49.28,10.67 90 top
U$60  [#IO0#0]  49.28,10.67 90 bottom
U$61  [#IO1#0]  46.74,10.54 90 top
U$62  [#IO1#0]  46.74,10.54 90 bottom
U$63  [I2C]  84.33,16.38 0 bottom
U$64  [QWIIC_5MM]  75.95,17.02 90 top
U$65  SPARKX-LOGO3  [SPARKX-SMALL]  84.07,27.18 0 bottom
U$66  [#PWR#0]  91.69,14.99 90 top
U$67  [#GND#0]  82.8,10.92 90 top
U$68  [#3#3V#0]  85.34,11.05 90 top
U$69  [#SDA#0]  87.88,10.92 90 top
U$70  [#SCL#0]  90.42,10.79 90 top
U$71  [#GND#0]  82.8,10.92 90 bottom
U$72  [#3#3V#0]  85.34,11.05 90 bottom
U$73  [#SDA#0]  87.88,10.92 90 bottom
U$74  [#SCL#0]  90.42,10.79 90 bottom
U$75  SPARKX-LOGO3  [SPARKX-SMALL]  84.07,38.61 90 top
U$76  [IP#0]  93.73,31.62 0 top
U$77  [IP#0]  92.08,31.62 0 bottom
U$78  [IP#0]  75.95,31.62 0 top
U$79  [IP#0]  74.42,31.62 0 bottom
U$80  [#HI#0]  97.41,22.67 0 top
U$81  [#HI#0]  97.41,22.67 0 bottom
U$82  [#LO#0]  70.93,22.67 0 top
U$83  [#LO#0]  70.93,22.67 0 bottom
U$84  [#VINN#0]  88.9,18.67 0 bottom
U$85  [#IP##0]  93.73,25.15 90 bottom
U$86  [ACS378000]  73.91,16.38 0 bottom
U$87  [METER0]  73.91,17.65 0 bottom
U$88  [POWER0]  73.91,18.92 0 bottom
U$89  [QWIIC0]  73.91,20.19 0 bottom
U$90  [#IO0#0]  80.26,10.67 90 top
U$91  [#IO0#0]  80.26,10.67 90 bottom
U$92  [#IO1#0]  77.72,10.54 90 top
U$93  [#IO1#0]  77.72,10.54 90 bottom
U$94  [I2C]  115.32,16.38 0 bottom
U$95  [QWIIC_5MM]  106.93,17.02 90 top
U$96  SPARKX-LOGO3  [SPARKX-SMALL]  115.06,27.18 0 bottom
U$97  [#PWR#0]  122.68,14.99 90 top
U$98  [#GND#0]  113.79,10.92 90 top
U$99  [#3#3V#0]  116.33,11.05 90 top
U$100  [#SDA#0]  118.87,10.92 90 top
U$101  [#SCL#0]  121.41,10.79 90 top
U$102  [#GND#0]  113.79,10.92 90 bottom
U$103  [#3#3V#0]  116.33,11.05 90 bottom
U$104  [#SDA#0]  118.87,10.92 90 bottom
U$105  [#SCL#0]  121.41,10.79 90 bottom
U$106  SPARKX-LOGO3  [SPARKX-SMALL]  115.06,38.61 90 top
U$107  [IP#0]  124.71,31.62 0 top
U$108  [IP#0]  123.06,31.62 0 bottom
U$109  [IP#0]  106.93,31.62 0 top
U$110  [IP#0]  105.41,31.62 0 bottom
U$111  [#HI#0]  128.4,22.67 0 top
U$112  [#HI#0]  128.4,22.67 0 bottom
U$113  [#LO#0]  101.92,22.67 0 top
U$114  [#LO#0]  101.92,22.67 0 bottom
U$115  [#VINN#0]  119.89,18.67 0 bottom
U$116  [#IP##0]  124.71,25.15 90 bottom
U$117  [ACS378000]  104.9,16.38 0 bottom
U$118  [METER0]  104.9,17.65 0 bottom
U$119  [POWER0]  104.9,18.92 0 bottom
U$120  [QWIIC0]  104.9,20.19 0 bottom
U$121  [#IO0#0]  111.25,10.67 90 top
U$122  [#IO0#0]  111.25,10.67 90 bottom
U$123  [#IO1#0]  108.71,10.54 90 top
U$124  [#IO1#0]  108.71,10.54 90 bottom
U$125  [I2C]  22.35,54.99 0 bottom
U$126  [QWIIC_5MM]  13.97,55.63 90 top
U$127  SPARKX-LOGO3  [SPARKX-SMALL]  22.1,65.79 0 bottom
U$128  [#PWR#0]  29.72,53.59 90 top
U$129  [#GND#0]  20.83,49.53 90 top
U$130  [#3#3V#0]  23.37,49.66 90 top
U$131  [#SDA#0]  25.91,49.53 90 top
U$132  [#SCL#0]  28.45,49.4 90 top
U$133  [#GND#0]  20.83,49.53 90 bottom
U$134  [#3#3V#0]  23.37,49.66 90 bottom
U$135  [#SDA#0]  25.91,49.53 90 bottom
U$136  [#SCL#0]  28.45,49.4 90 bottom
U$137  SPARKX-LOGO3  [SPARKX-SMALL]  22.1,77.22 90 top
U$138  [IP#0]  31.75,70.23 0 top
U$139  [IP#0]  30.1,70.23 0 bottom
U$140  [IP#0]  13.97,70.23 0 top
U$141  [IP#0]  12.45,70.23 0 bottom
U$142  [#HI#0]  35.43,61.28 0 top
U$143  [#HI#0]  35.43,61.28 0 bottom
U$144  [#LO#0]  8.95,61.28 0 top
U$145  [#LO#0]  8.95,61.28 0 bottom
U$146  [#VINN#0]  26.92,57.28 0 bottom
U$147  [#IP##0]  31.75,63.75 90 bottom
U$148  [ACS378000]  11.94,54.99 0 bottom
U$149  [METER0]  11.94,56.26 0 bottom
U$150  [POWER0]  11.94,57.53 0 bottom
U$151  [QWIIC0]  11.94,58.8 0 bottom
U$152  [#IO0#0]  18.29,49.28 90 top
U$153  [#IO0#0]  18.29,49.28 90 bottom
U$154  [#IO1#0]  15.75,49.15 90 top
U$155  [#IO1#0]  15.75,49.15 90 bottom
U$156  [I2C]  53.34,54.99 0 bottom
U$157  [QWIIC_5MM]  44.96,55.63 90 top
U$158  SPARKX-LOGO3  [SPARKX-SMALL]  53.09,65.79 0 bottom
U$159  [#PWR#0]  60.71,53.59 90 top
U$160  [#GND#0]  51.82,49.53 90 top
U$161  [#3#3V#0]  54.36,49.66 90 top
U$162  [#SDA#0]  56.9,49.53 90 top
U$163  [#SCL#0]  59.44,49.4 90 top
U$164  [#GND#0]  51.82,49.53 90 bottom
U$165  [#3#3V#0]  54.36,49.66 90 bottom
U$166  [#SDA#0]  56.9,49.53 90 bottom
U$167  [#SCL#0]  59.44,49.4 90 bottom
U$168  SPARKX-LOGO3  [SPARKX-SMALL]  53.09,77.22 90 top
U$169  [IP#0]  62.74,70.23 0 top
U$170  [IP#0]  61.09,70.23 0 bottom
U$171  [IP#0]  44.96,70.23 0 top
U$172  [IP#0]  43.43,70.23 0 bottom
U$173  [#HI#0]  66.42,61.28 0 top
U$174  [#HI#0]  66.42,61.28 0 bottom
U$175  [#LO#0]  39.94,61.28 0 top
U$176  [#LO#0]  39.94,61.28 0 bottom
U$177  [#VINN#0]  57.91,57.28 0 bottom
U$178  [#IP##0]  62.74,63.75 90 bottom
U$179  [ACS378000]  42.93,54.99 0 bottom
U$180  [METER0]  42.93,56.26 0 bottom
U$181  [POWER0]  42.93,57.53 0 bottom
U$182  [QWIIC0]  42.93,58.8 0 bottom
U$183  [#IO0#0]  49.28,49.28 90 top
U$184  [#IO0#0]  49.28,49.28 90 bottom
U$185  [#IO1#0]  46.74,49.15 90 top
U$186  [#IO1#0]  46.74,49.15 90 bottom
U$187  [I2C]  84.33,54.99 0 bottom
U$188  [QWIIC_5MM]  75.95,55.63 90 top
U$189  SPARKX-LOGO3  [SPARKX-SMALL]  84.07,65.79 0 bottom
U$190  [#PWR#0]  91.69,53.59 90 top
U$191  [#GND#0]  82.8,49.53 90 top
U$192  [#3#3V#0]  85.34,49.66 90 top
U$193  [#SDA#0]  87.88,49.53 90 top
U$194  [#SCL#0]  90.42,49.4 90 top
U$195  [#GND#0]  82.8,49.53 90 bottom
U$196  [#3#3V#0]  85.34,49.66 90 bottom
U$197  [#SDA#0]  87.88,49.53 90 bottom
U$198  [#SCL#0]  90.42,49.4 90 bottom
U$199  SPARKX-LOGO3  [SPARKX-SMALL]  84.07,77.22 90 top
U$200  [IP#0]  93.73,70.23 0 top
U$201  [IP#0]  92.08,70.23 0 bottom
U$202  [IP#0]  75.95,70.23 0 top
U$203  [IP#0]  74.42,70.23 0 bottom
U$204  [#HI#0]  97.41,61.28 0 top
U$205  [#HI#0]  97.41,61.28 0 bottom
U$206  [#LO#0]  70.93,61.28 0 top
U$207  [#LO#0]  70.93,61.28 0 bottom
U$208  [#VINN#0]  88.9,57.28 0 bottom
U$209  [#IP##0]  93.73,63.75 90 bottom
U$210  [ACS378000]  73.91,54.99 0 bottom
U$211  [METER0]  73.91,56.26 0 bottom
U$212  [POWER0]  73.91,57.53 0 bottom
U$213  [QWIIC0]  73.91,58.8 0 bottom
U$214  [#IO0#0]  80.26,49.28 90 top
U$215  [#IO0#0]  80.26,49.28 90 bottom
U$216  [#IO1#0]  77.72,49.15 90 top
U$217  [#IO1#0]  77.72,49.15 90 bottom
U$218  [I2C]  115.32,54.99 0 bottom
U$219  [QWIIC_5MM]  106.93,55.63 90 top
U$220  SPARKX-LOGO3  [SPARKX-SMALL]  115.06,65.79 0 bottom
U$221  [#PWR#0]  122.68,53.59 90 top
U$222  [#GND#0]  113.79,49.53 90 top
U$223  [#3#3V#0]  116.33,49.66 90 top
U$224  [#SDA#0]  118.87,49.53 90 top
U$225  [#SCL#0]  121.41,49.4 90 top
U$226  [#GND#0]  113.79,49.53 90 bottom
U$227  [#3#3V#0]  116.33,49.66 90 bottom
U$228  [#SDA#0]  118.87,49.53 90 bottom
U$229  [#SCL#0]  121.41,49.4 90 bottom
U$230  SPARKX-LOGO3  [SPARKX-SMALL]  115.06,77.22 90 top
U$231  [IP#0]  124.71,70.23 0 top
U$232  [IP#0]  123.06,70.23 0 bottom
U$233  [IP#0]  106.93,70.23 0 top
U$234  [IP#0]  105.41,70.23 0 bottom
U$235  [#HI#0]  128.4,61.28 0 top
U$236  [#HI#0]  128.4,61.28 0 bottom
U$237  [#LO#0]  101.92,61.28 0 top
U$238  [#LO#0]  101.92,61.28 0 bottom
U$239  [#VINN#0]  119.89,57.28 0 bottom
U$240  [#IP##0]  124.71,63.75 90 bottom
U$241  [ACS378000]  104.9,54.99 0 bottom
U$242  [METER0]  104.9,56.26 0 bottom
U$243  [POWER0]  104.9,57.53 0 bottom
U$244  [QWIIC0]  104.9,58.8 0 bottom
U$245  [#IO0#0]  111.25,49.28 90 top
U$246  [#IO0#0]  111.25,49.28 90 bottom
U$247  [#IO1#0]  108.71,49.15 90 top
U$248  [#IO1#0]  108.71,49.15 90 bottom
U$249  [I2C]  22.35,93.6 0 bottom
U$250  [QWIIC_5MM]  13.97,94.23 90 top
U$251  SPARKX-LOGO3  [SPARKX-SMALL]  22.1,104.39 0 bottom
U$252  [#PWR#0]  29.72,92.2 90 top
U$253  [#GND#0]  20.83,88.14 90 top
U$254  [#3#3V#0]  23.37,88.27 90 top
U$255  [#SDA#0]  25.91,88.14 90 top
U$256  [#SCL#0]  28.45,88.01 90 top
U$257  [#GND#0]  20.83,88.14 90 bottom
U$258  [#3#3V#0]  23.37,88.27 90 bottom
U$259  [#SDA#0]  25.91,88.14 90 bottom
U$260  [#SCL#0]  28.45,88.01 90 bottom
U$261  SPARKX-LOGO3  [SPARKX-SMALL]  22.1,115.82 90 top
U$262  [IP#0]  31.75,108.84 0 top
U$263  [IP#0]  30.1,108.84 0 bottom
U$264  [IP#0]  13.97,108.84 0 top
U$265  [IP#0]  12.45,108.84 0 bottom
U$266  [#HI#0]  35.43,99.89 0 top
U$267  [#HI#0]  35.43,99.89 0 bottom
U$268  [#LO#0]  8.95,99.89 0 top
U$269  [#LO#0]  8.95,99.89 0 bottom
U$270  [#VINN#0]  26.92,95.89 0 bottom
U$271  [#IP##0]  31.75,102.36 90 bottom
U$272  [ACS378000]  11.94,93.6 0 bottom
U$273  [METER0]  11.94,94.87 0 bottom
U$274  [POWER0]  11.94,96.14 0 bottom
U$275  [QWIIC0]  11.94,97.41 0 bottom
U$276  [#IO0#0]  18.29,87.88 90 top
U$277  [#IO0#0]  18.29,87.88 90 bottom
U$278  [#IO1#0]  15.75,87.76 90 top
U$279  [#IO1#0]  15.75,87.76 90 bottom
U$280  [I2C]  53.34,93.6 0 bottom
U$281  [QWIIC_5MM]  44.96,94.23 90 top
U$282  SPARKX-LOGO3  [SPARKX-SMALL]  53.09,104.39 0 bottom
U$283  [#PWR#0]  60.71,92.2 90 top
U$284  [#GND#0]  51.82,88.14 90 top
U$285  [#3#3V#0]  54.36,88.27 90 top
U$286  [#SDA#0]  56.9,88.14 90 top
U$287  [#SCL#0]  59.44,88.01 90 top
U$288  [#GND#0]  51.82,88.14 90 bottom
U$289  [#3#3V#0]  54.36,88.27 90 bottom
U$290  [#SDA#0]  56.9,88.14 90 bottom
U$291  [#SCL#0]  59.44,88.01 90 bottom
U$292  SPARKX-LOGO3  [SPARKX-SMALL]  53.09,115.82 90 top
U$293  [IP#0]  62.74,108.84 0 top
U$294  [IP#0]  61.09,108.84 0 bottom
U$295  [IP#0]  44.96,108.84 0 top
U$296  [IP#0]  43.43,108.84 0 bottom
U$297  [#HI#0]  66.42,99.89 0 top
U$298  [#HI#0]  66.42,99.89 0 bottom
U$299  [#LO#0]  39.94,99.89 0 top
U$300  [#LO#0]  39.94,99.89 0 bottom
U$301  [#VINN#0]  57.91,95.89 0 bottom
U$302  [#IP##0]  62.74,102.36 90 bottom
U$303  [ACS378000]  42.93,93.6 0 bottom
U$304  [METER0]  42.93,94.87 0 bottom
U$305  [POWER0]  42.93,96.14 0 bottom
U$306  [QWIIC0]  42.93,97.41 0 bottom
U$307  [#IO0#0]  49.28,87.88 90 top
U$308  [#IO0#0]  49.28,87.88 90 bottom
U$309  [#IO1#0]  46.74,87.76 90 top
U$310  [#IO1#0]  46.74,87.76 90 bottom
U$311  [I2C]  84.33,93.6 0 bottom
U$312  [QWIIC_5MM]  75.95,94.23 90 top
U$313  SPARKX-LOGO3  [SPARKX-SMALL]  84.07,104.39 0 bottom
U$314  [#PWR#0]  91.69,92.2 90 top
U$315  [#GND#0]  82.8,88.14 90 top
U$316  [#3#3V#0]  85.34,88.27 90 top
U$317  [#SDA#0]  87.88,88.14 90 top
U$318  [#SCL#0]  90.42,88.01 90 top
U$319  [#GND#0]  82.8,88.14 90 bottom
U$320  [#3#3V#0]  85.34,88.27 90 bottom
U$321  [#SDA#0]  87.88,88.14 90 bottom
U$322  [#SCL#0]  90.42,88.01 90 bottom
U$323  SPARKX-LOGO3  [SPARKX-SMALL]  84.07,115.82 90 top
U$324  [IP#0]  93.73,108.84 0 top
U$325  [IP#0]  92.08,108.84 0 bottom
U$326  [IP#0]  75.95,108.84 0 top
U$327  [IP#0]  74.42,108.84 0 bottom
U$328  [#HI#0]  97.41,99.89 0 top
U$329  [#HI#0]  97.41,99.89 0 bottom
U$330  [#LO#0]  70.93,99.89 0 top
U$331  [#LO#0]  70.93,99.89 0 bottom
U$332  [#VINN#0]  88.9,95.89 0 bottom
U$333  [#IP##0]  93.73,102.36 90 bottom
U$334  [ACS378000]  73.91,93.6 0 bottom
U$335  [METER0]  73.91,94.87 0 bottom
U$336  [POWER0]  73.91,96.14 0 bottom
U$337  [QWIIC0]  73.91,97.41 0 bottom
U$338  [#IO0#0]  80.26,87.88 90 top
U$339  [#IO0#0]  80.26,87.88 90 bottom
U$340  [#IO1#0]  77.72,87.76 90 top
U$341  [#IO1#0]  77.72,87.76 90 bottom
U$342  [I2C]  115.32,93.6 0 bottom
U$343  [QWIIC_5MM]  106.93,94.23 90 top
U$344  SPARKX-LOGO3  [SPARKX-SMALL]  115.06,104.39 0 bottom
U$345  [#PWR#0]  122.68,92.2 90 top
U$346  [#GND#0]  113.79,88.14 90 top
U$347  [#3#3V#0]  116.33,88.27 90 top
U$348  [#SDA#0]  118.87,88.14 90 top
U$349  [#SCL#0]  121.41,88.01 90 top
U$350  [#GND#0]  113.79,88.14 90 bottom
U$351  [#3#3V#0]  116.33,88.27 90 bottom
U$352  [#SDA#0]  118.87,88.14 90 bottom
U$353  [#SCL#0]  121.41,88.01 90 bottom
U$354  SPARKX-LOGO3  [SPARKX-SMALL]  115.06,115.82 90 top
U$355  [IP#0]  124.71,108.84 0 top
U$356  [IP#0]  123.06,108.84 0 bottom
U$357  [IP#0]  106.93,108.84 0 top
U$358  [IP#0]  105.41,108.84 0 bottom
U$359  [#HI#0]  128.4,99.89 0 top
U$360  [#HI#0]  128.4,99.89 0 bottom
U$361  [#LO#0]  101.92,99.89 0 top
U$362  [#LO#0]  101.92,99.89 0 bottom
U$363  [#VINN#0]  119.89,95.89 0 bottom
U$364  [#IP##0]  124.71,102.36 90 bottom
U$365  [ACS378000]  104.9,93.6 0 bottom
U$366  [METER0]  104.9,94.87 0 bottom
U$367  [POWER0]  104.9,96.14 0 bottom
U$368  [QWIIC0]  104.9,97.41 0 bottom
U$369  [#IO0#0]  111.25,87.88 90 top
U$370  [#IO0#0]  111.25,87.88 90 bottom
U$371  [#IO1#0]  108.71,87.76 90 top
U$372  [#IO1#0]  108.71,87.76 90 bottom
VINN  JUMPER-SMT_2_NC_TRACE_SILK  [SMT-JUMPER_2_NC_TRACE_SILK]  26.92,20.32 180 bottom
VINN1  JUMPER-SMT_2_NC_TRACE_SILK  [SMT-JUMPER_2_NC_TRACE_SILK]  57.91,20.32 180 bottom
VINN2  JUMPER-SMT_2_NC_TRACE_SILK  [SMT-JUMPER_2_NC_TRACE_SILK]  88.9,20.32 180 bottom
VINN3  JUMPER-SMT_2_NC_TRACE_SILK  [SMT-JUMPER_2_NC_TRACE_SILK]  119.89,20.32 180 bottom
VINN4  JUMPER-SMT_2_NC_TRACE_SILK  [SMT-JUMPER_2_NC_TRACE_SILK]  26.92,58.93 180 bottom
VINN5  JUMPER-SMT_2_NC_TRACE_SILK  [SMT-JUMPER_2_NC_TRACE_SILK]  57.91,58.93 180 bottom
VINN6  JUMPER-SMT_2_NC_TRACE_SILK  [SMT-JUMPER_2_NC_TRACE_SILK]  88.9,58.93 180 bottom
VINN7  JUMPER-SMT_2_NC_TRACE_SILK  [SMT-JUMPER_2_NC_TRACE_SILK]  119.89,58.93 180 bottom
VINN8  JUMPER-SMT_2_NC_TRACE_SILK  [SMT-JUMPER_2_NC_TRACE_SILK]  26.92,97.54 180 bottom
VINN9  JUMPER-SMT_2_NC_TRACE_SILK  [SMT-JUMPER_2_NC_TRACE_SILK]  57.91,97.54 180 bottom
VINN10  JUMPER-SMT_2_NC_TRACE_SILK  [SMT-JUMPER_2_NC_TRACE_SILK]  88.9,97.54 180 bottom
VINN11  JUMPER-SMT_2_NC_TRACE_SILK  [SMT-JUMPER_2_NC_TRACE_SILK]  119.89,97.54 180 bottom

## Library data of the parts
C1-C12 = SparkFun-Capacitors; PROD_ID: CAP-00810
D1-D12 = SparkFun-LED; PROD_ID: DIO-00819
E$1-E$4 LOGO1-LOGO12 U$16 U$28 U$64 U$95 U$126 U$157 U$188 U$219 U$250 U$281 U$312 U$343 = SparkFun-Aesthetics
E$5 E$6 = SparkFun-Retired
HI HI1-HI11 J3 J5 J9 J10 J14 J15 J19 J20 J24 J25 J29 J30 J34 J35 J39 J40 J44 J45 J49 J50 J54 J55 J59 J60 LO LO1-LO11 = SparkFun-Connectors
I2C I2C1-I2C11 IP+ IP+1-IP+11 PWR PWR1-PWR11 VINN VINN1-VINN11 = SparkFun-Jumpers
J1 J8 J13 J18 J23 J28 J33 J38 J43 J48 J53 J58 = SparkFun-Connectors; PROD_ID: CONN-09696
J2 J4 J6 J7 J11 J12 J16 J17 J21 J22 J26 J27 J31 J32 J36 J37 J41 J42 J46 J47 J51 J52 J56 J57 = SparkFun-Connectors; PROD_ID: CONN-13694
JP1-JP72 = SparkFun
R1 R2 R4 R5 R11-R14 R20-R23 R29-R32 R38-R41 R47-R50 R56-R59 R65-R68 R74-R77 R83-R86 R92-R95 R101-R104 = SparkFun-Resistors; PROD_ID: RES-07857
R3 R10 R19 R28 R37 R46 R55 R64 R73 R82 R91 R100 = SparkFun-Resistors; PROD_ID: RES-07856
R6-R9 R15-R18 R24-R27 R33-R36 R42-R45 R51-R54 R60-R63 R69-R72 R78-R81 R87-R90 R96-R99 R105-R108 = SparkFun-Resistors; PROD_ID: RES-07868
RSENSE RSENSE1-RSENSE11 = SparkFun-Resistors; PROD_ID: RES-10646
U1-U12 = New-Parts_SparkFun-IC-Power; DIGIKEY_PART: 620-ACS37800KMACTR-030B3-I2CCT-ND; MANU_PART: ACS37800KMACTR-030B3-I2C
U$1-U$14 U$17 U$19 U$21-U$26 U$30-U$43 U$45-U$62 U$66-U$74 U$76-U$93 U$97-U$105 U$107-U$124 U$128-U$136 U$138-U$155 U$159-U$167 U$169-U$186 U$190-U$198 U$200-U$217 U$221-U$229 U$231-U$248 U$252-U$260 U$262-U$279 U$283-U$291 U$293-U$310 U$314-U$322 U$324-U$341 U$345-U$353 U$355-U$372 = output
U$15 U$27 U$63 U$94 U$125 U$156 U$187 U$218 U$249 U$280 U$311 U$342 = SparkFun-Buzzard
U$18 U$20 U$29 U$44 U$65 U$75 U$96 U$106 U$127 U$137 U$158 U$168 U$189 U$199 U$220 U$230 U$251 U$261 U$282 U$292 U$313 U$323 U$344 U$354 = SparkX